# Altium PCB SENtral M&M.PcbDoc
Units mil, origin at the board's own origin, x right, y up, seen from the top; angles counter-clockwise.
Board outline 1680 x 2134 mil, 2 copper layers (Top Layer, Bottom Layer); 32 components, 18 nets, 139 pads, 28 vias.
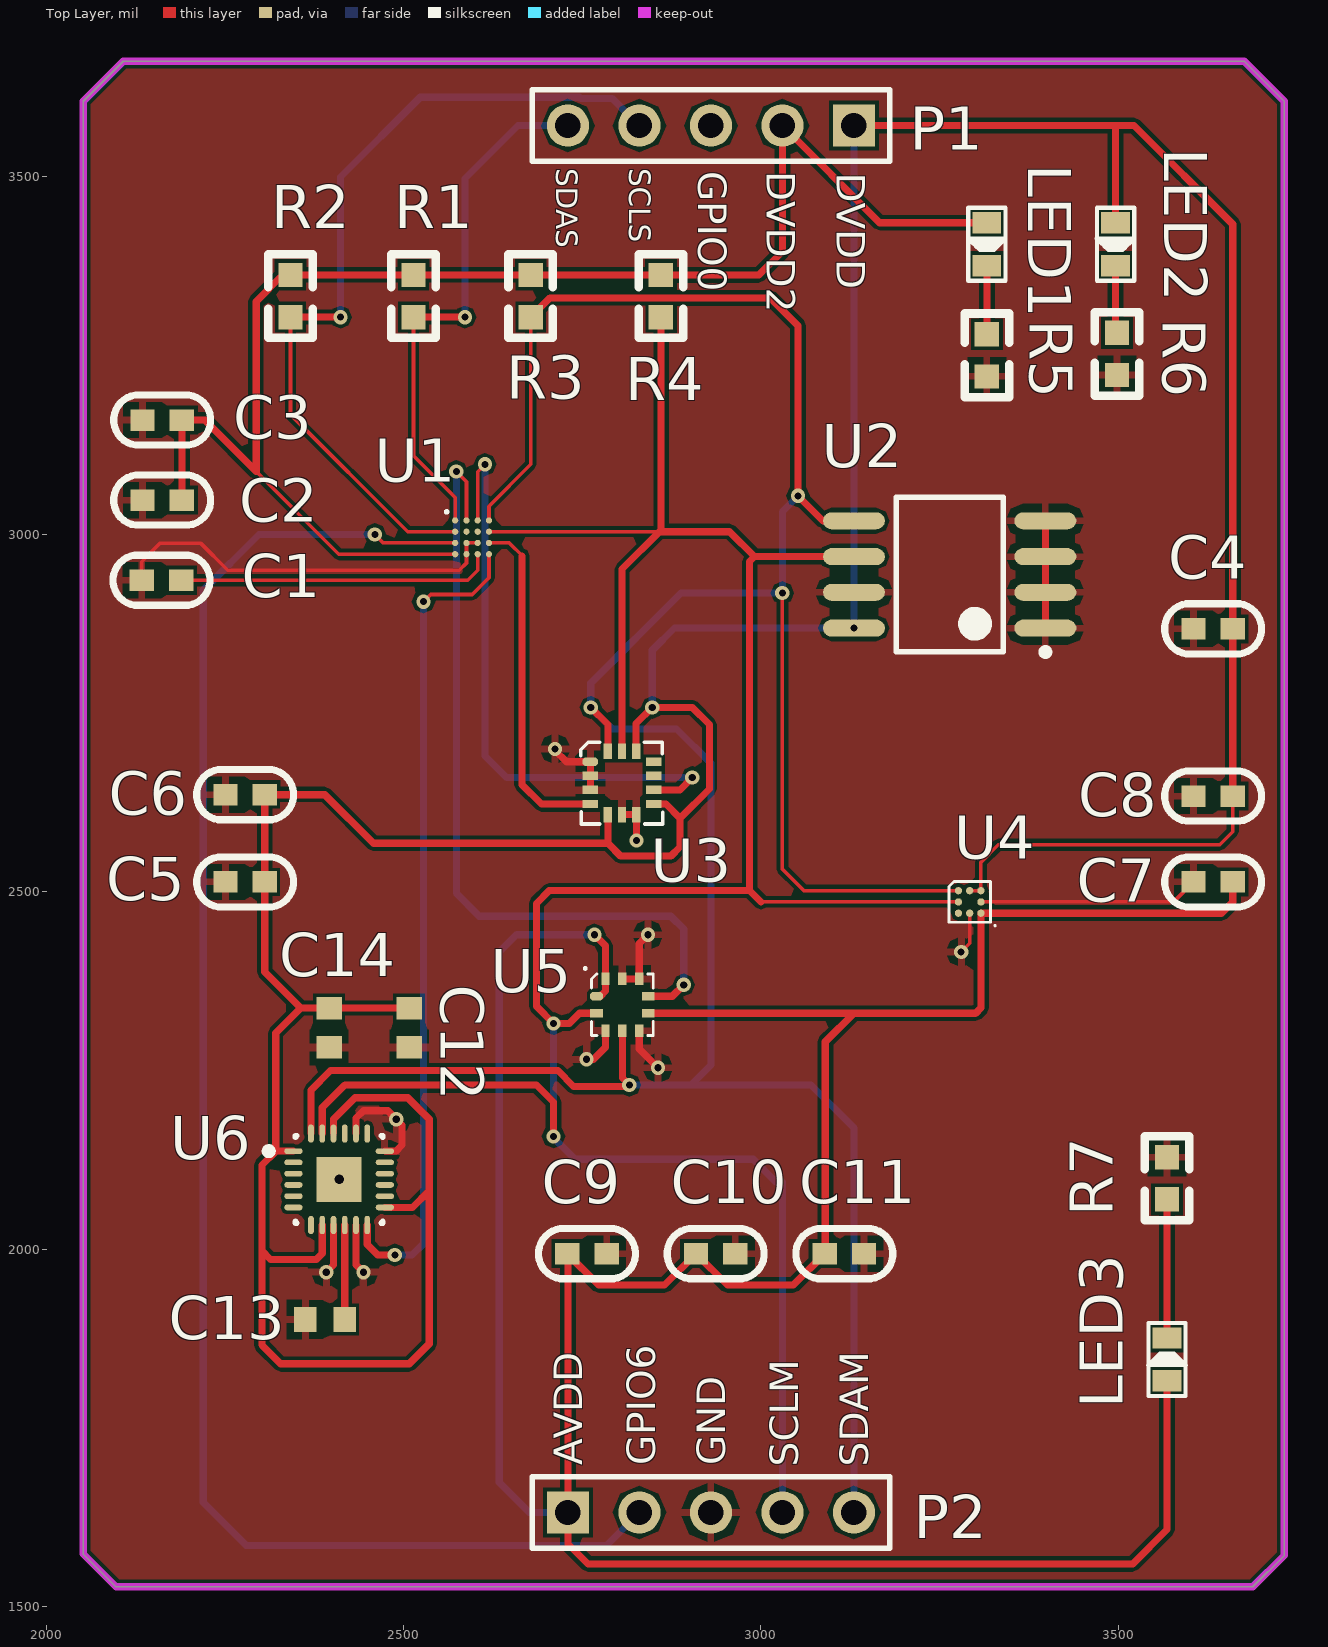
[diagram p0: Top Layer view]
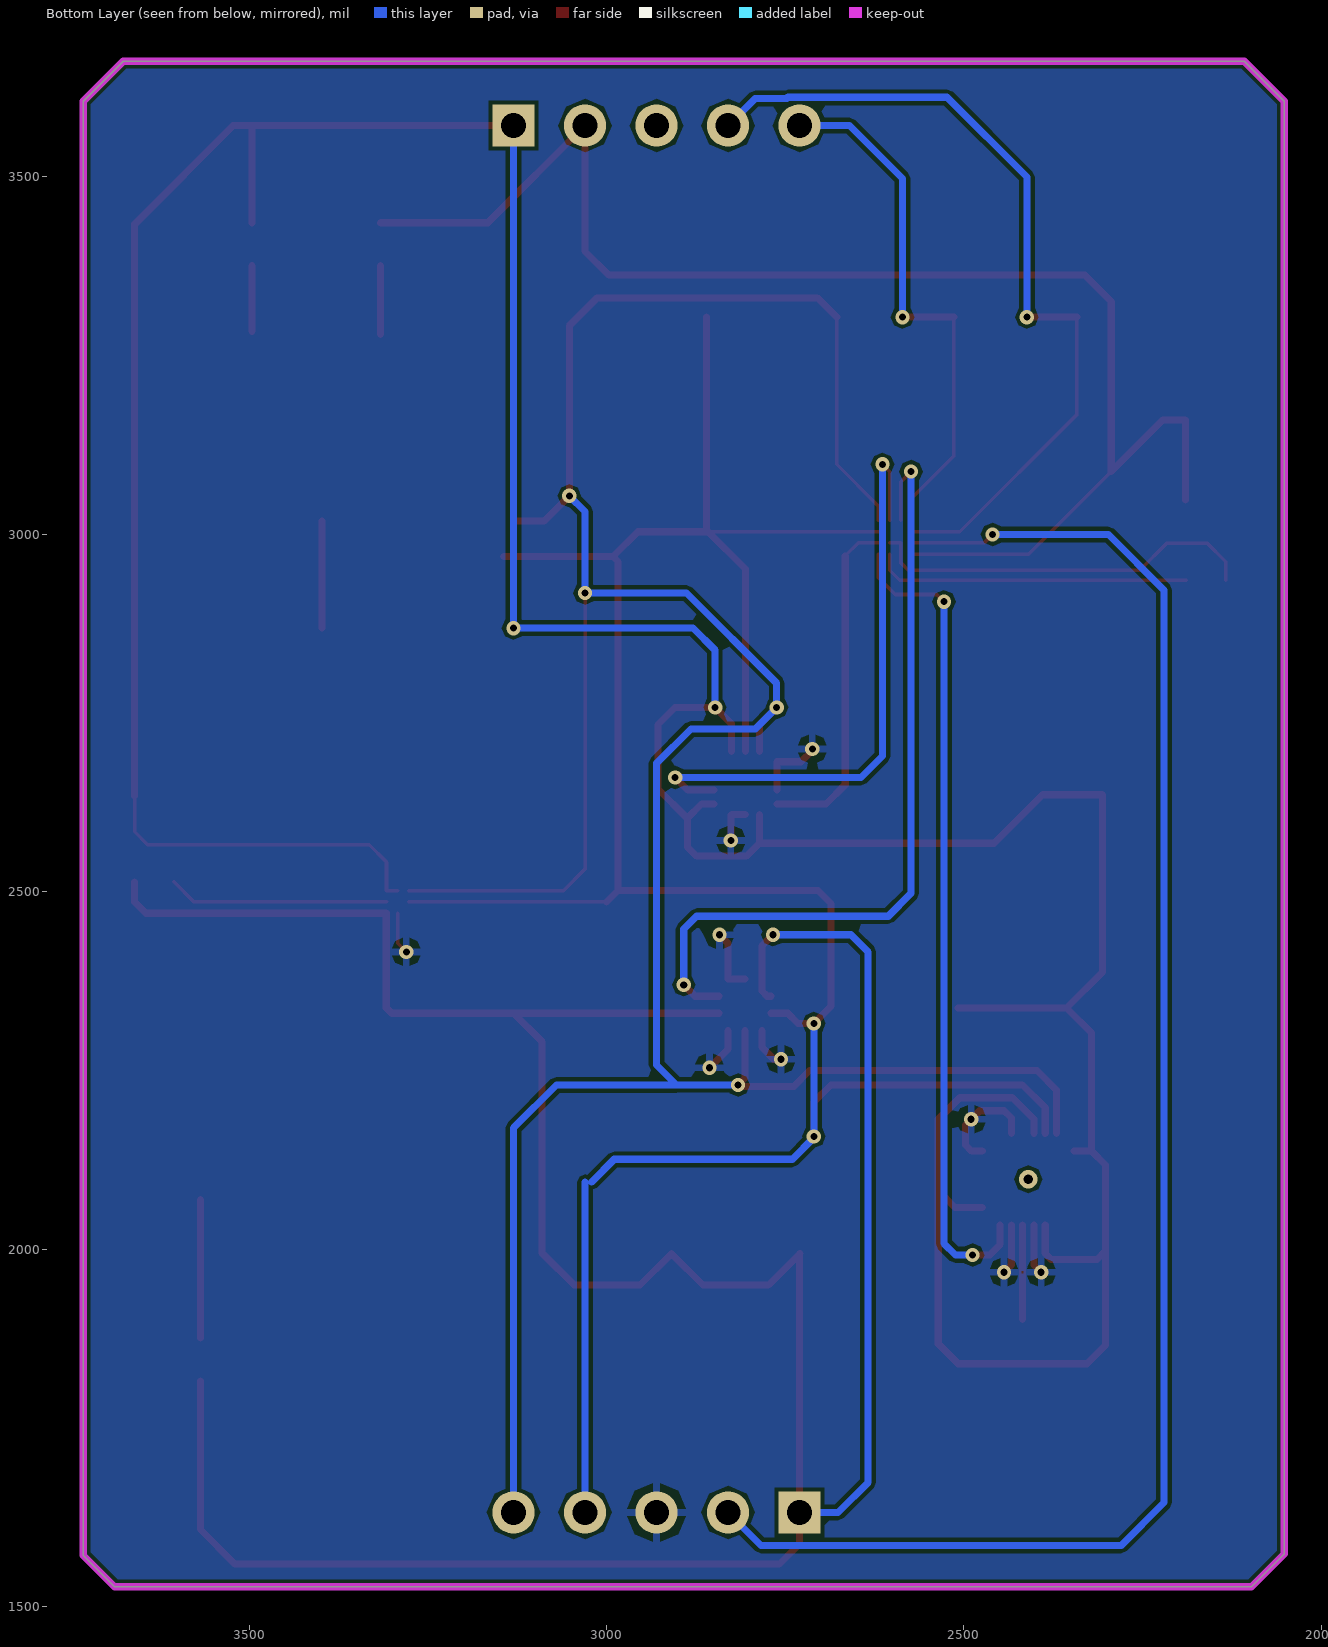
[diagram p1: Bottom Layer view, seen from below]

## Layer stack, top to bottom
Top Solder: solder mask 0.4, Solder Resist, Dk 3.5
Top Layer: signal copper 1.4
Dielectric 1: dielectric 12.6, FR-4, Dk 4.8
Bottom Layer: signal copper 1.4
Bottom Solder: solder mask 0.4, Solder Resist, Dk 3.5

## Board outline
2052,1574 2098,1528 3688,1528 3732,1572 3732,3606 3676,3662 2108,3662 2052,3606

## Design rules (kind name [scope] priority, off if disabled: settings)
Clearance [All] p1: gap=5
HoleSize [All] p1: absolutevalues=TRUE maxlimit=100 minlimit=6 maxpercent=80.000 minpercent=20.000
PolygonConnect [All] p1: connectstyle=Relief reliefconductorwidth=10 reliefentries=4 polygonreliefangle="90 Angle" airgapwidth=10
RoutingVias [All] p1: holewidth=28 width=50 viastyle="Through Hole" minholewidth=6 minwidth=50 maxholewidth=28 maxwidth=50
SolderMaskExpansion [All] p1: expansion=4
Width [All] p1: maxlimit=50 minlimit=5 preferedwidth=10
29 further rules are at their usual default settings.

## Components (designator, comment, footprint, x,y, rotation, side; value= is the part's Value field where it differs from the comment)
C1 "1uF" 0603 2161,2936 r180 top
C2 "1uF" 0603 2162,3048 r180 top
C3 "0,1uF" 0603 2162,3160 r180 top
C4 "0.1uF" 0603 3632,2868 r180 top
C5 "0.1uF" 0603 2278,2514 r180 top
C6 "0.1uF" 0603 2278,2636 r180 top
C7 "100nF" 0603 3632,2514 r180 top
C8 "0.1uF" 0603 3632,2634 r180 top
C9 "0.1uF" 0603 2757.18,1994 r0 top
C10 "4.7uF" 0603 2937.18,1994 r0 top
C11 "0.1uF" 0603 3117.18,1994 r0 top
C12 "Cap" CAPC1608L 2508,2310 r90 top
C13 "Cap" CAPC1608L 2390,1902 r180 top
C14 "Cap" CAPC1608L 2396,2310 r90 top
LED1 "LED" SMDLED-0603 3316,3436 r0 top
LED2 "LED" SMDLED-0603 3496,3436 r0 top
LED3 "LED" SMDLED-0603 3568.01,1816 r180 top
P1 "Header 5" HDR1X5 3130,3572 r180 top
P2 "Header 5" HDR1X5 2730,1632 r0 top
R1 "4.7k" 0603P 2514,3304 r90 top
R2 "4.7k" 0603P 2342,3304 r90 top
R3 "4.7k" 0603P 2678,3304 r90 top
R4 "4.7k" 0603P 2860,3304 r90 top
R5 "2k" 0603P 3316,3280 r270 top
R6 "2k" 0603P 3498,3282 r270 top
R7 "2k" 0603P 3568,2070 r90 top
U1 "SENtral" BGA16C40P4X4_160X160X51 2596,2996 r0 top
U2 "M24256WMW6" SO8W_N 3264,2944 r180 top
U3 "LSM6DS3" LGA-14L 2850,2682 r0 top
U4 "AK09911" UFBGA8 3292,2486 r0 top
U5 "LPS25H" HLGA-10L 2770,2354 r0 top
U6 "mpu9250" mpu9250 2410,2098 r0 top

## Footprints (in the part's own frame and the unit in brackets; to place one, negate y for a bottom-side part, rotate by r counter-clockwise, add the part's x,y. Pads: shape width x height; smd on the part's side, far side on the other; paste and mask are expansions set on the pad)
0603 [mil]
  rect 33.94x30 smd: 1(-28,0) 2(27,0)
  silkscreen extent -68,-35 67,35
0603P [mil]
  rect 33.94x33.94 smd: 1(0,0) 2(58.94,0)
  silkscreen extent -29,-31 88,31
BGA16C40P4X4_160X160X51 [mm] "BGA, 16-Leads, Body 1.60x1.60mmx0.51mm, Pitch 0.40mm"
  round 0.22 smd: A1(-0.6,0.6) A2(-0.2,0.6) A3(0.2,0.6) A4(0.6,0.6) B1(-0.6,0.2) B2(-0.2,0.2) B3(0.2,0.2) B4(0.6,0.2) C1(-0.6,-0.2) C2(-0.2,-0.2) C3(0.2,-0.2) C4(0.6,-0.2) D1(-0.6,-0.6) D2(-0.2,-0.6) D3(0.2,-0.6) D4(0.6,-0.6)
  silkscreen extent -0.95,0.86 -0.85,0.95, body extent -0.8,-0.8 0.8,0.8, height 0.52
CAPC1608L [mm]
  rect 0.8x0.9 smd: 1(-0.7,0) 2(0.7,0)
  body extent -0.8,-0.4 0.8,0.4, height 0.7
HDR1X5 [mm] "Connector; Header; 5 Position"
  rect 1.5x1.5 hole 0.9: 1(0,0)
  round 1.5 hole 0.9: 2(2.54,0) 3(5.08,0) 4(7.62,0) 5(10.16,0)
  silkscreen extent -1.27,-1.27 11.43,1.27
HLGA-10L [mm]
  oct 0.45x0.3 smd: 1(0,0)
  rect 0.45x0.3 smd: 2(0,-0.6) 6(1.84,-0.6) 7(1.84,0)
  rect 0.3x0.45 smd: 3(0.32,-1.22) 4(0.92,-1.22) 5(1.52,-1.22) 8(1.52,0.62) 9(0.92,0.62) 10(0.32,0.62)
  silkscreen extent -0.44,-1.39 2.01,1.03, body extent -0.33,-1.55 2.17,0.95, height 0.9
LGA-14L [mm]
  oct 0.55x0.3 smd: 1(-2.25,0)
  rect 0.55x0.3 smd: 2(-2.25,-0.5) 3(-2.25,-1) 4(-2.25,-1.5) 8(0,-1.5) 9(0,-1) 10(0,-0.5) 11(0,0)
  rect 0.3x0.55 smd: 5(-1.625,-1.875) 6(-1.125,-1.875) 7(-0.625,-1.875) 12(-0.625,0.375) 13(-1.125,0.375) 14(-1.625,0.375)
  silkscreen extent -2.59,-2.21 0.32,0.7, body extent -2.63,-2.25 0.38,0.75, height 0.96
mpu9250 [mm]
  oval 0.65x0.2 smd: 1(-1.625,1) 2(-1.625,0.6) 3(-1.625,0.2) 4(-1.625,-0.2) 5(-1.625,-0.6) 6(-1.625,-1) 13(1.625,-1) 14(1.625,-0.6) 15(1.625,-0.2) 16(1.625,0.2) 17(1.625,0.6) 18(1.625,1)
  oval 0.2x0.65 smd: 7(-1,-1.625) 8(-0.6,-1.625) 9(-0.2,-1.625) 10(0.2,-1.625) 11(0.6,-1.625) 12(1,-1.625) 19(1,1.625) 20(0.6,1.625) 21(0.2,1.625) 22(-0.2,1.625) 23(-0.6,1.625) 24(-1,1.625)
  rect 1.6x1.6 smd: 25(0,0)
  silkscreen extent -2.62,-1.55 1.55,1.55, body extent -1.55,-1.55 1.55,1.55, height 1.05
SMDLED-0603 [mil]
  rect 40x30 smd: 1(0,0) 2(0,-60)
  silkscreen extent -27,-81 27,21
SO8W_N [mm] "SOP, 8-Leads, Body 5.3x5.3mm, Pitch 1.27mm, IPC Medium Density"
  oval 2.2x0.6 smd: 1(-3.4,1.905) 2(-3.4,0.635) 3(-3.4,-0.635) 4(-3.4,-1.905) 5(3.4,-1.905) 6(3.4,-0.635) 7(3.4,0.635) 8(3.4,1.905)
  silkscreen extent -3.52,-2.75 1.9,2.88, body extent -2.73,-2.75 2.73,2.75, height 2.13
UFBGA8 [mm]
  round 0.26 smd: A1(0.4,-0.4) A2(0,-0.4) A3(-0.4,-0.4) B1(0.4,0) B3(-0.4,0) C1(0.4,0.4) C2(0,0.4) C3(-0.4,0.4)
  silkscreen extent -0.74,-0.85 0.91,0.73, body extent -0.63,-0.63 0.63,0.63, height 0.57

## Part data
C1 C2 C3 C4 C5 C6 C7 C8 C9 C10 C11: library part C
C12: library part Cap_2, "Capacitor"
C13: "Capacitor"
C14: library part Cap_1, "Capacitor"
P1 P2: "Header, 5-Pin"
R1 R2 R3 R4 R5 R6 R7: library part R, "贴片电阻"
U1: "PNI SENtral"
U2: "256 Kbit Serial I睠 Bus EEPROM without Chip Enable Lines"

## Via types
v1: diameter 20, hole 10, Top Layer to Bottom Layer, 27 vias
v2: diameter 25.98, hole 12.99, Top Layer to Bottom Layer, 1 vias

## Nets (pads, with @x,y where several pads share a name; then routed paths per layer and width w, separated by ;. In a path a pad name is that pad's centre, name@x,y a point inside that pad or via, vN(x,y) a via of type N, cw(c..) or ccw(c..) an arc to the next point about the centre after c; other vN are vias at no path point)
AVDD: C7.1 C9.1 C10.1 C11.1 LED3.1 P2.1 U4.A1 U5.1 U5.6 U5.10 | length 4356
  Top Layer w10: C9.1 2773.18,1950 2865.18,1950 C10.1 2953.18,1950 3045.18,1950 C11.1 ; C9.1@2730,1994 P2.1 2730,1588 2758,1560 3520,1560 3568.01,1608.01 LED3.1 ; v1(2767.2,2440) 2782.6,2424.6 U5.10 2782.6,2361.4 2775.2,2354 U5.1 ; U5.6 3130,2330.38 ; C11.1@3090,1994 3090,2290.38 3130,2330.38 ; C7.1 3660,2486 3644.25,2470.25 3308,2470.25 3308,2338 3300.38,2330.38 3130,2330.38
  Bottom Layer w10: P2.1 2676,1632 2634,1674 2634,2416 2658,2440 v1(2767.2,2440)
DVDD: C4.1 C5.1 C6.1 C8.1 C12.2 C14.2 LED2.1 P1.1 U2.8 U3.5 U3.8 U3.12 U4.C1 U4.C2 U6.1 U6.8 U6.13 U6.22 | length 6073.4
  Top Layer w5: U4.C2 U4.C1 3307.75,2541.75 3332,2566 3642,2566 3660,2584 C8.1
  Top Layer w10: U6.1 2321.37,2137.37 ; U6.8 2386.38,1994.38 2378,1986 2314,1986 2302,1998 ; U6.22 2402.13,2182.13 2432,2212 2506,2212 2536,2182 2536,2082 ; U6.13 2512.63,2058.63 2536,2082 ; C12.2 C14.2 2356.44,2337.56 ; U3.5 2786.02,2567.98 ; U3.12 2825.39,2735.39 v1(2848,2758) 2904,2758 2928,2734 2928,2644 2886.95,2602.95 2886.95,2562.95 2874,2550 2804,2550 2786.02,2567.98 ; U3.8 2867.05,2622.95 2886.95,2603.05 ; P1.1 3522,3572 3660,3434 C4.1 C8.1 ; LED2.1 3496,3570 ; 2302,1998 2302,1866 2328,1840 2508,1840 2536,1868 2536,2082 ; 2302,1998 2302,2118 2321.37,2137.37 ; 2321.37,2137.37 2321.37,2302.49 2356.44,2337.56 ; 2356.44,2337.56 2306,2388 C5.1 C6.1 2390,2636 2458.02,2567.98 2786.02,2567.98
  Bottom Layer w10: v1(2848,2758) 2848,2838 2879,2869 v1(3130.14,2869) P1.1@3130.14,3571.86
DVDD2: C2.1 C3.1 LED1.1 P1.2 R1.2 R2.2 R3.2 R4.2 U1.D1 | length 2093.4
  Top Layer w5: 2294,3088 2409.62,2972.38 U1.D1
  Top Layer w10: C2.1 C3.1 2222,3160 2294,3088 2294,3326 2330.94,3362.94 R2.2 R3.2 R4.2 2996.94,3362.94 3030,3396 P1.2 3166,3436 LED1.1
GND: C1.2 C2.2 C3.2 C4.2 C5.2 C6.2 C7.2 C8.2 C9.2 C10.2 C11.2 C12.1 C13.2 C14.1 P2.3 R5.2 R6.2 R7.2 U1.C2 U1.C3 U1.D2 U2.1 U2.2 U2.3 U2.4 U2.7 U3.1 U3.2 U3.3 U3.6 U3.7 U4.A2 U4.B1 U5.3 U5.5 U5.8 U5.9 U6.9 U6.11 U6.18 U6.20 | length 1730
  Top Layer w5: C1.2 2134,2962 2160,2988 2216,2988 2254,2950 2578,2950 2588.13,2960.13 U1.D2 U1.C2 U1.C3 ; v1(3280,2416) 3292,2428 U4.A2 ; U4.B1 3577,2486 C7.2
  Top Layer w10: v1(2392,1968) 2402.13,1978.13 U6.9 ; U6.11 2433.62,1978.38 v1(2444,1968) ; U6.20 2433.62,2183.62 2444,2194 2478,2194 2498,2174 2498,2146 2489.37,2137.37 U6.18 ; v1(2712,2700) 2712,2698 2728,2682 U3.1 U3.2 U3.3 ; v1(2756,2266) 2766,2266 2782.6,2282.6 U5.3 ; U3.6 U3.7 ; U5.9 U5.8 2829.84,2427.84 v1(2842,2440) ; v1(2826,2572) U3.7@2826,2607.57 ; U5.5 2829.84,2280.16 v1(2856,2254) ; U2.1 U2.2 U2.3 U2.4
  other v1: 2490,2182
NetC1_1: C1.1 U1.D3 | length 443
  Top Layer w5: C1.1 2589.75,2936 2603.87,2950.13 U1.D3
NetC13_1: C13.1 U6.10 | length 131.7
  Top Layer w10: C13.1@2417.87,1902.31 U6.10
NetLED1_2: LED1.2 R5.1 | length 96
  Top Layer w10: R5.1 LED1.2
NetLED2_2: LED2.2 R6.1 | length 92
  Top Layer w10: R6.1@3496,3284 LED2.2
NetLED3_2: LED3.2 R7.1 | length 194
  Top Layer w10: LED3.2 R7.1
NetP1_4: P1.4 R2.1 U1.B1 | length 1181.1
  Top Layer w5: R2.1 2342,3167.75 2505.87,3003.87 U1.B1
  Top Layer w10: R2.1 v1(2412,3304)
  Bottom Layer w10: v1(2412,3304) 2412,3500 2523.53,3611.53 2746.37,3611.53 2747.9,3610 2792,3610 P1.4
NetP1_5: P1.5 R1.1 U1.A1 | length 749.2
  Top Layer w5: R1.1 2514,3110 2572.38,3051.62 U1.A1
  Top Layer w10: R1.1 v1(2586,3304)
  Bottom Layer w10: v1(2586,3304) 2586,3498 2660,3572 P1.5
NetP2_2: P2.2 U1.C1 | length 2319.5
  Top Layer w5: v1(2460,3000) 2471.87,2988.13 U1.C1
  Bottom Layer w10: v1(2460,3000) 2298,3000 2220,2922 2220,1646 2280,1586 2784,1586 P2.2
NetP2_4: P2.4 R4.1 U1.B4 U2.6 U3.13 U4.B3 U5.2 U6.23 | length 3876.7
  Top Layer w5: U1.B4 2858,3003.87 ; 3000,2486 U4.B3
  Top Layer w10: U6.23 2386.38,2198.38 2418,2230 2686,2230 2710,2206 v1(2710,2158) ; U5.2 2746.38,2330.38 2732,2316 v1(2710,2316) 2686,2340 2686,2484 2704,2502 2984,2502 ; U3.13 2805.71,2951.58 2858,3003.87 ; R4.1 2860,3005.87 2858,3003.87 ; 3000,2486 2984,2502 ; U2.6@3144.14,2969 U2.6 2991,2969 ; 2858,3003.87 2956.13,3003.87 2991,2969 ; 2984,2502 2984,2962 2991,2969
  Bottom Layer w10: v1(2710,2316) v1(2710,2158) 2710,2156 2740,2126 2989.18,2126 3021.18,2094 ; P2.4 3030,2094
NetP2_5: P2.5 R3.1 U1.A4 U2.5 U3.14 U4.C3 U5.4 U6.24 | length 4405.9
  Top Layer w5: U1.A4 2619.62,3039.62 2678,3098 R3.1 ; v1(3030,2918) 3030,2532 3060.25,2501.75 U4.C3
  Top Layer w10: U6.24 2370.63,2222.63 2398,2250 2716,2250 2738,2228 2814,2228 v1(2816,2230) 2806.22,2239.78 U5.4 ; R3.1 2704.97,3330.97 3013.03,3330.97 3052,3292 v1(3052,3054) ; v1(2762,2758) 2786.02,2733.98 U3.14 ; v1@3048,3054 v1(3052,3054) ; U2.5 3087,3019 v1(3052,3054)
  Bottom Layer w10: v1(2816,2230) 2902,2230 ; v1(3052,3054) 3030,3032 v1(3030,2918) 2888,2918 2762,2792 v1(2762,2758) 2792,2728 2882,2728 2930,2680 2930,2258 2902,2230 ; P2.5 3130,2170 3070,2230 2902,2230
NetU1_A2: U1.A2 U5.7 | length 1137.1
  Top Layer w5: v1(2574,3088) 2588.13,3073.87 U1.A2
  Top Layer w10: U5.7 2876,2354 v1(2892,2370)
  Bottom Layer w10: v1(2574,3088) 2574,2498 2606,2466 2874,2466 2892,2448 v1(2892,2370)
NetU1_A3: U1.A3 U3.9 | length 854.2
  Top Layer w5: U1.A3 2603.87,3087.87 v1(2614,3098)
  Top Layer w10: U3.9 2886.63,2642.63 v1(2904,2660)
  Bottom Layer w10: v1(2614,3098) 2614,2690 2644,2660 v1(2904,2660)
NetU1_C4: U1.C4 U3.4 | length 480.5
  Top Layer w5: U1.C4 2647.87,2988.13 2666,2970
  Top Layer w10: 2666,2970 2666,2650 2693.05,2622.95 U3.4
NetU1_D4: U1.D4 U6.12 | length 1155
  Top Layer w5: v1(2528,2906) 2538,2916 2596,2916 2619.62,2939.62 U1.D4
  Top Layer w10: U6.12 2449.37,2006.63 2464,1992 v1(2488,1992)
  Bottom Layer w10: v1(2488,1992) 2512,1992 2528,2008 v1(2528,2906)
pads on no net: P1.3 U1.B2 U1.B3 U3.10 U3.11 U4.A3 U6.2 U6.3 U6.4 U6.5 U6.6 U6.7 U6.14 U6.15 U6.16 U6.17 U6.19 U6.21 U6.25
copper on no net:
  other v2: 2410,2098

## Polygon pours and split planes (outlines as drawn)
GND on Top Layer "Bottom Layer-No Net" (solid, pour order 2): 2108,3662 2052,3606 2052,1574 2098,1528 3688,1528 3732,1572 3732,3606 3676,3662 2108,3662
GND on Bottom Layer "Bottom Layer-No Net" (solid, pour order 4): 2106,3660 2052,3606 2052,1574 2098,1528 3686,1528 3730,1572 3732,1572 3732,3606 3676,3662 2108,3662

## Keep-outs
Keep-Out Layer:
  lines w10: 2052,1574 2052,3606 2108,3662 3578,3662 3676,3662 3732,3606 3732,3568 3732,1572 3688,1528 2098,1528 2052,1574

## Silkscreen, mask and mechanical layers (free items; w line width, h text height)
Top Overlay:
  text "SDAS" at 2714,3512 h30 r270
  text "SCLS" at 2816,3512 h30 r270
  text "GPIO0" at 2912,3508 h40 r270
  text "DVDD2" at 3008,3508 h40 r270
  text "DVDD" at 3106,3506 h40 r270
  text "AVDD" at 2750,1698 h40 r90
  text "GPIO6" at 2852,1698 h40 r90
  text "GND" at 2950,1698 h40 r90
  text "SCLM" at 3052,1696 h40 r90
  text "SDAM" at 3150,1696 h40 r90